# Altium PCB PCB.PcbDoc
Units mm, origin at the board's own origin, x right, y up, seen from the top; angles counter-clockwise.
Board outline 30.23 x 41.15 mm, 2 copper layers (Top Layer, Bottom Layer); 18 components, 21 nets, 57 pads, 4 vias.
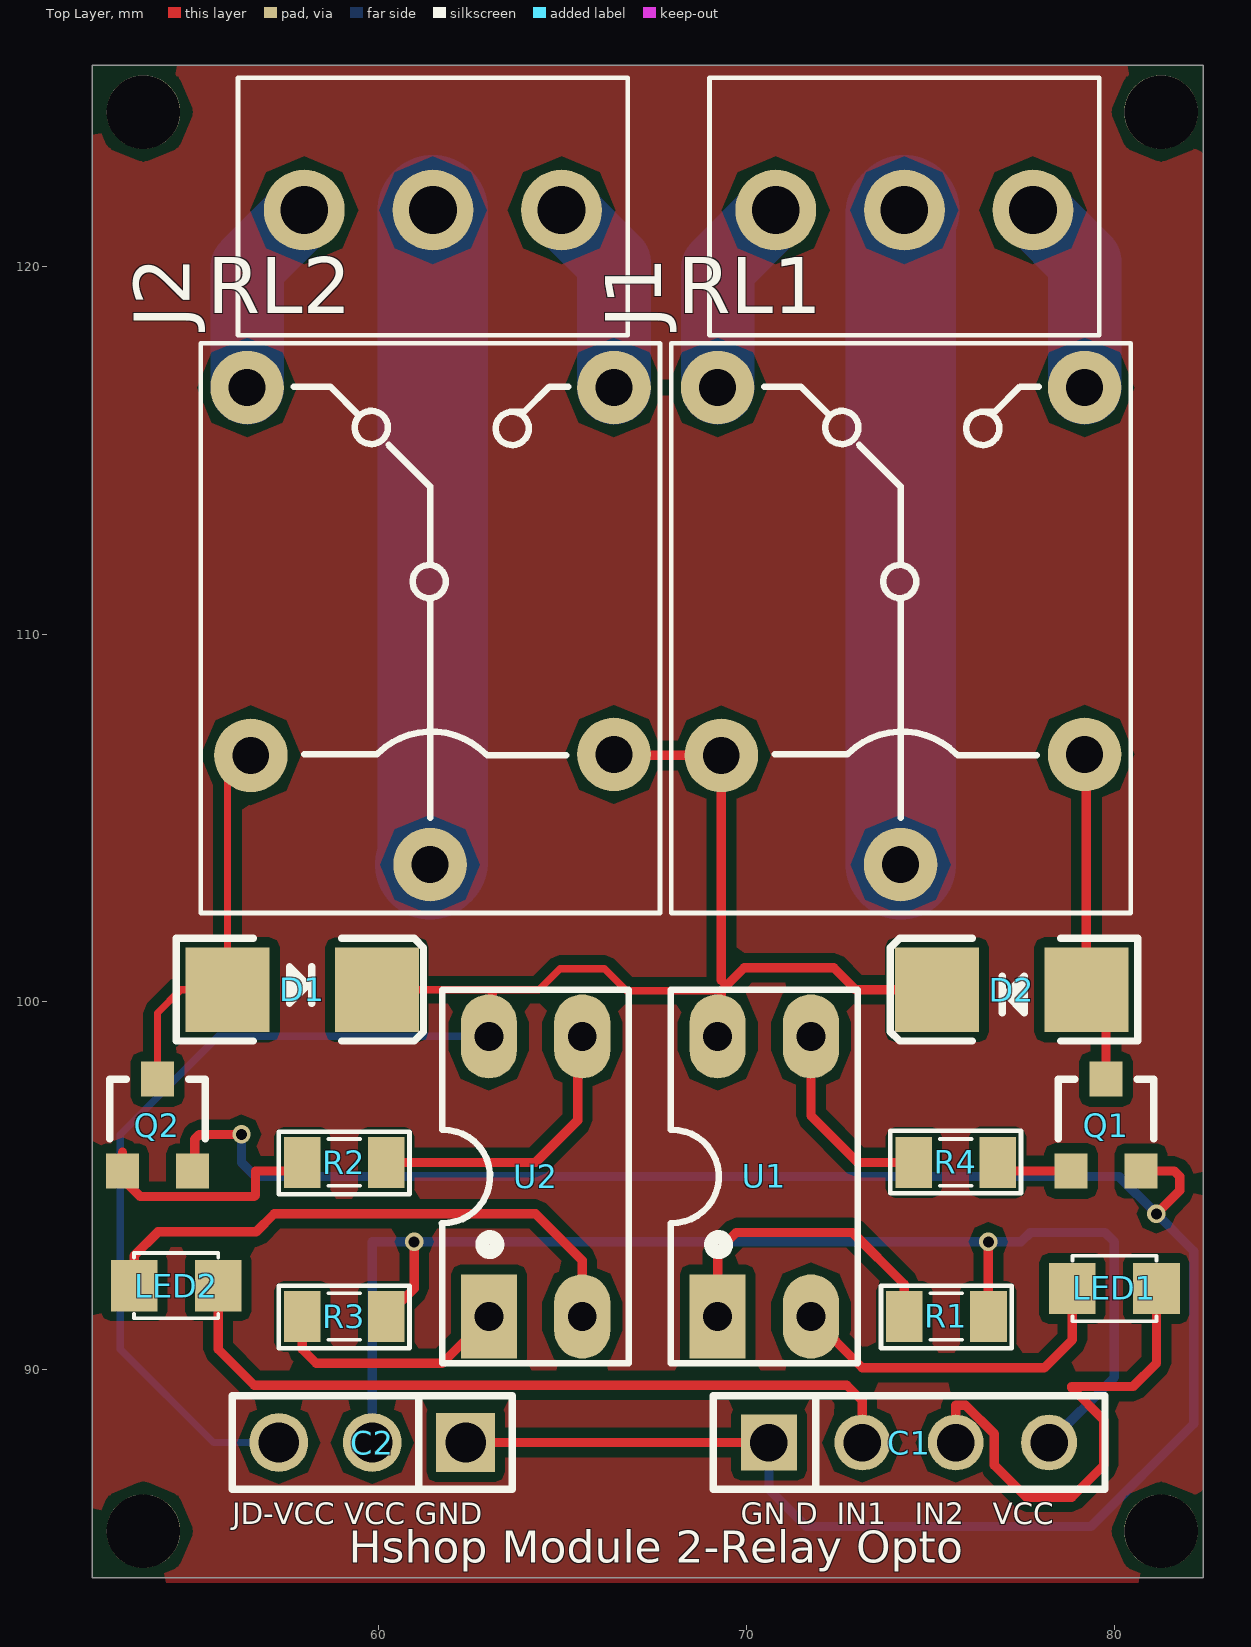
[diagram p0: Top Layer view]
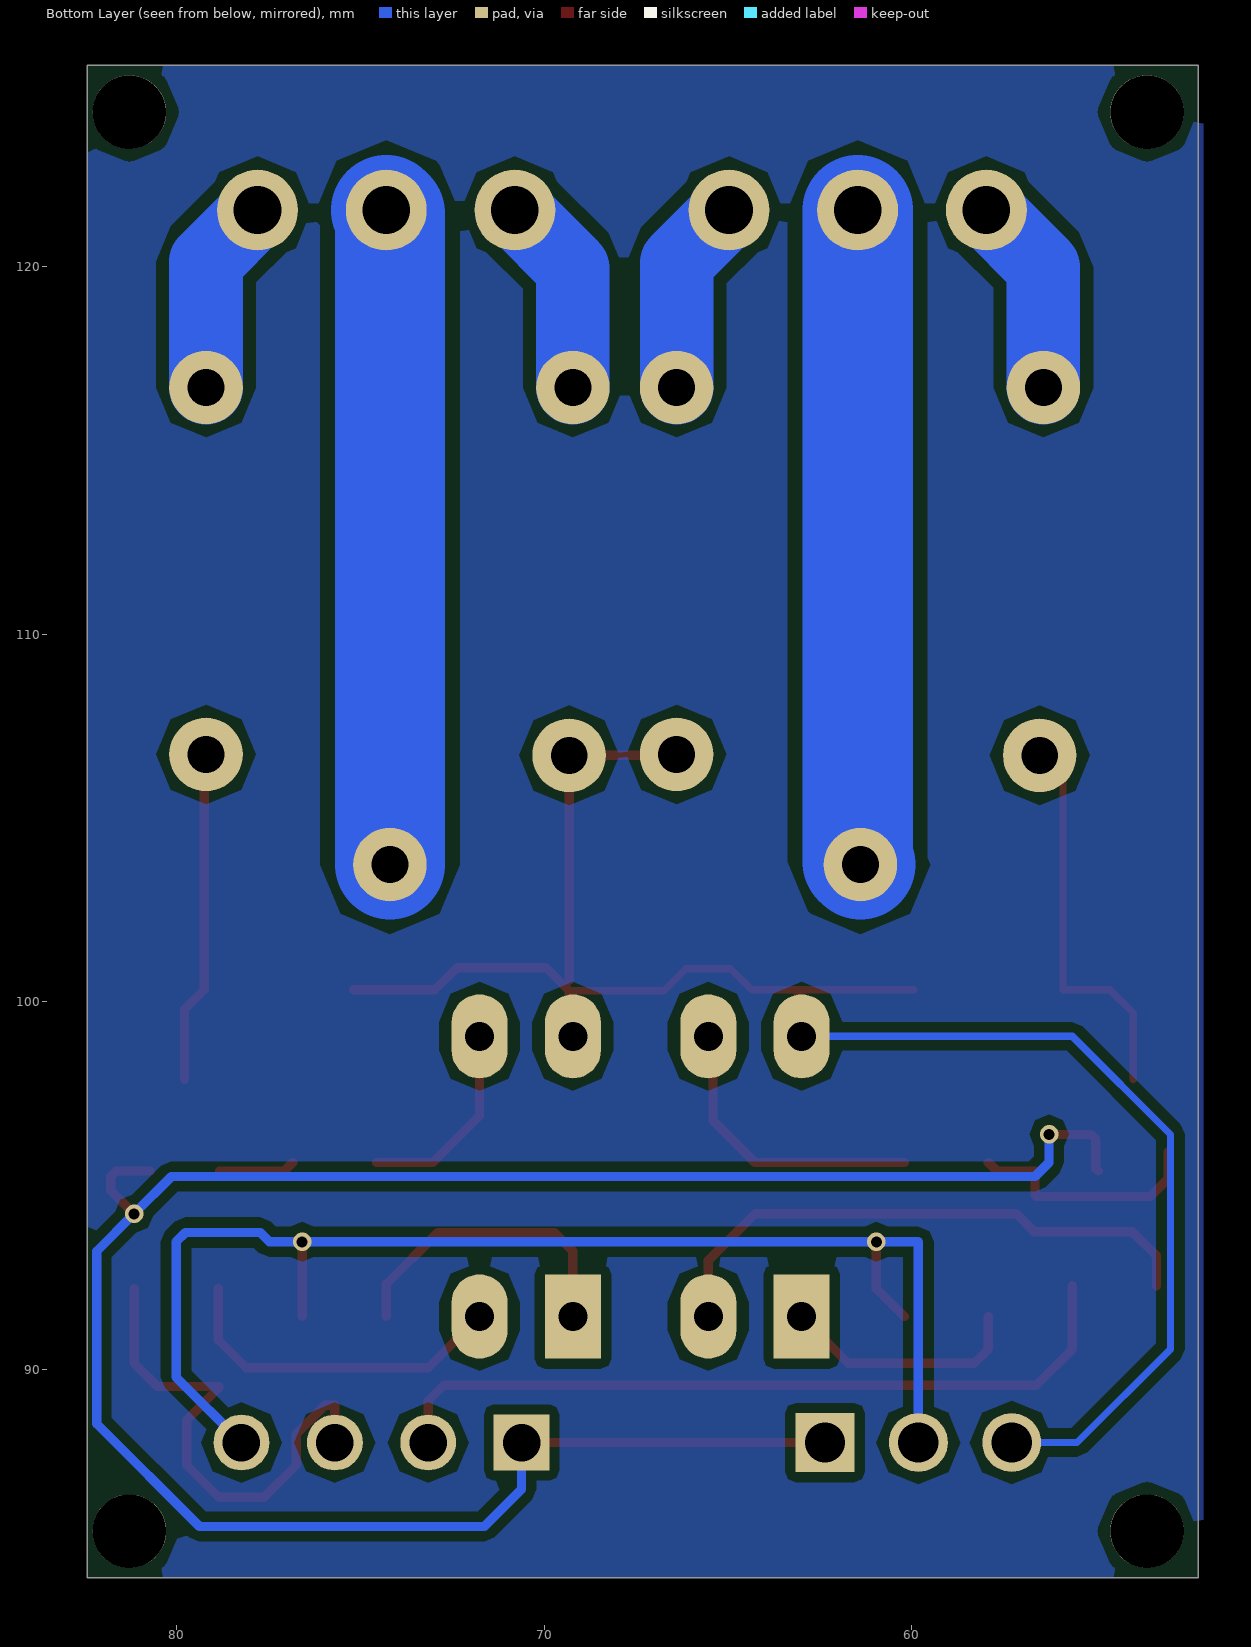
[diagram p1: Bottom Layer view, seen from below]
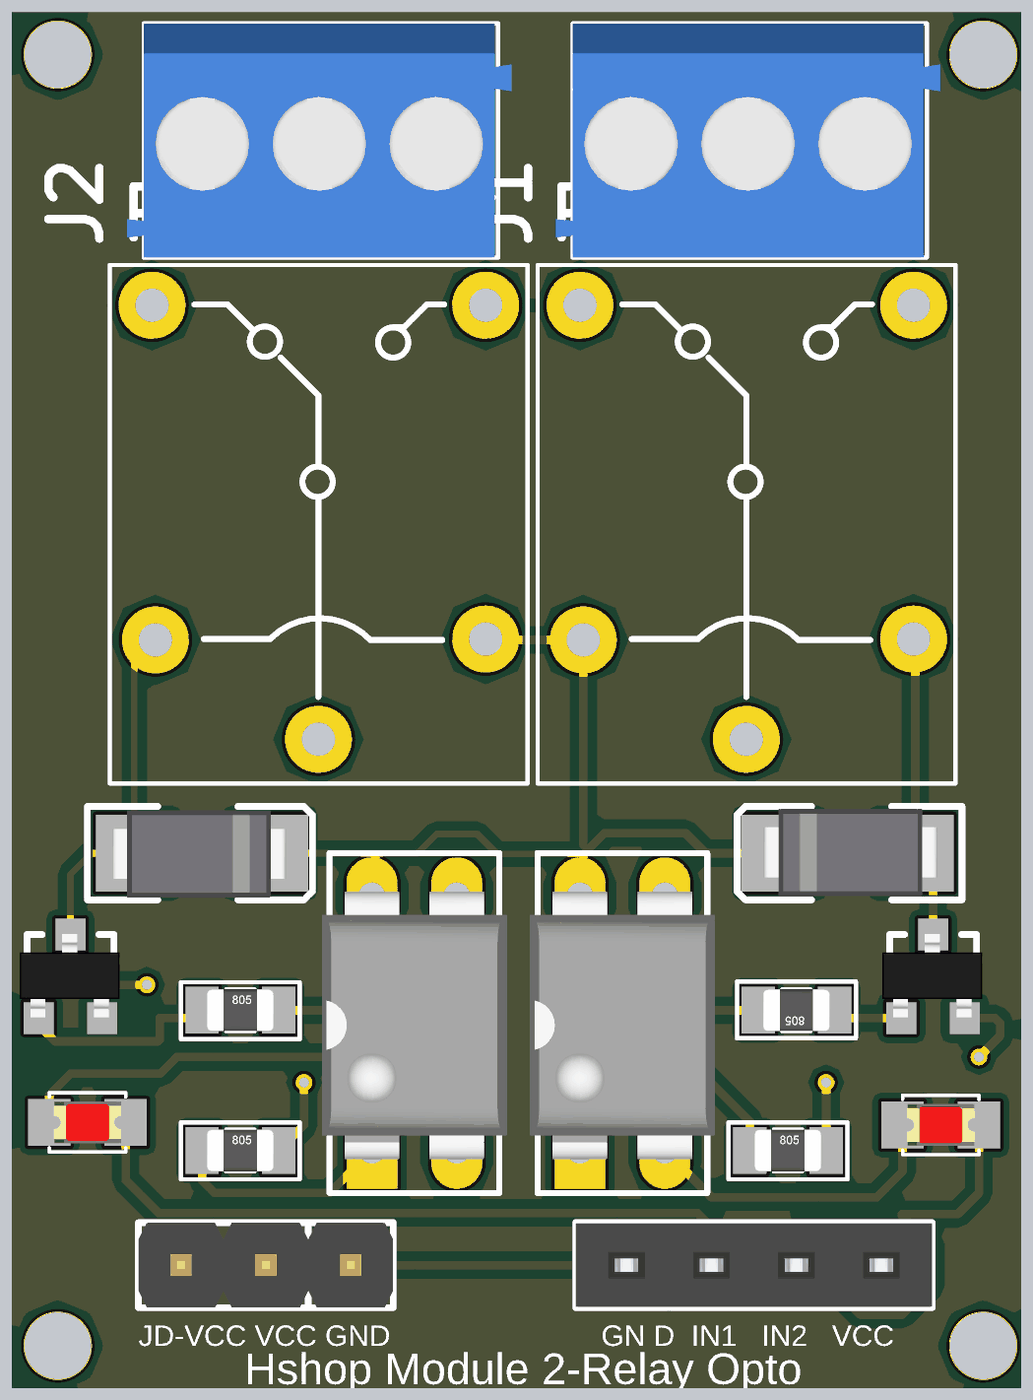
[diagram p2: 3D render of the assembled board from above, using the file's embedded part models]

## Layer stack, top to bottom
Top Solder: solder mask 0.0102, Solder Resist, Dk 3.5
Top Layer: signal copper 0.0356
Dielectric 1: dielectric 0.32, FR-4, Dk 4.8
Bottom Layer: signal copper 0.0356
Bottom Solder: solder mask 0.0102, Solder Resist, Dk 3.5

## Board outline
52.197,84.328 82.423,84.328 82.423,125.476 52.197,125.476

## Design rules (kind name [scope] priority, off if disabled: settings)
Clearance [All] p1: gap=0.254 ignorepadtopadclearanceinfootprint=FALSE
PolygonConnect [All] p1: connectstyle=Relief reliefconductorwidth=0.254 reliefentries=4 polygonreliefangle="90 Angle" airgapwidth=0.254
RoomDefinition Schematic [InComponentClass('Schematic')] p1: confinementstyle=ConfineIn formatcopy=TRUE lockcomponents=FALSE outline 0,0 50.8,0 50.8,25.4 0,25.4
RoutingVias [All] p1: holewidth=0.3 width=0.5 viastyle="Through Hole" minholewidth=0.3 minwidth=0.5 maxholewidth=0.3 maxwidth=0.5
SolderMaskExpansion [All] p1: expansion=0.102
Width [All] p1: maxlimit=3 minlimit=0.2 preferedwidth=0.4
30 further rules are at their usual default settings.

## Components (designator, comment, footprint, x,y, rotation, side; value= is the part's Value field where it differs from the comment)
C1 "JP4" JP4-C1T 70.612,88.011 r0 top
C2 "JP3" JP3-D1T 62.357,88.011 r180 top
D1 "Diode SMD" DIO-SMD-106 57.912,100.33 r180 top value=1N5007
D2 "Diode SMD" DIO-SMD-106 77.216,100.33 r0 top value=1N5007
J1 "KF3" KF3-3.5 74.295,121.539 r180 top
J2 "KF3" KF3-3.5 61.468,121.539 r180 top
LED1 "LED" LED-0805-Red 78.867,92.202 r0 top value="LED 3 - 5 ly 2 Colour"
LED2 "LED" LED-0805-Red 53.34,92.278 r0 top value="LED 3 - 5 ly 2 Colour"
Q1 "2N222" SOT23-231 79.781,96.647 r0 top value=C1815
Q2 "2N222" SOT23-231 53.975,96.647 r0 top value=C1815
R1 "1K" RES-SMD-0805 75.438,91.44 r0 top
R2 "0.51K" RES-SMD-0805 59.055,95.631 r0 top
R3 "1K" RES-SMD-0805 59.055,91.44 r0 top
R4 "0.51K" RES-SMD-0805 75.692,95.631 r180 top
RL1 "Relay 10A/12V" RL_T78 74.193,103.708 r90 top value="Relay SPDT, 10A, 12V"
RL2 "Relay 10A/12V" RL_T78 61.392,103.708 r90 top value="Relay SPDT, 10A, 12V"
U1 "PC817" DIP4 69.215,91.44 r0 top
U2 "PC817" DIP4 62.992,91.44 r0 top

## Footprints (in the part's own frame and the unit in brackets; to place one, negate y for a bottom-side part, rotate by r counter-clockwise, add the part's x,y. Pads: shape width x height; smd on the part's side, far side on the other; paste and mask are expansions set on the pad)
DIO-SMD-106 [mil]
  rect 90x90.55 smd: 1(80,0) 2(-80,0)
  silkscreen extent -130,-55 135,55, body extent -99,-50 106,52, height 95
DIP4 [mil]
  rect 60x90 hole 31: 1(0,0)
  oval 60x90 hole 31: 2(100,0) 3(100,300) 4(0,300)
  silkscreen extent -50,-50 150,350, body extent -59,-10 159,305, height 170
JP3-D1T [mm] "3 pins, 1 row, straight, gold plating"
  rect 1.6x1.6 hole 1.1: 1(0,0)
  round 1.6 hole 1.1: 2(2.54,0) 3(5.08,0)
  silkscreen extent -1.27,-1.27 6.35,1.27, body extent -1.27,-1.27 6.35,1.27, height 8.54
JP4-C1T [mm] "4 row, straight, gold plating"
  rect 1.52x1.52 hole 1.02: 1(0,0)
  round 1.52 hole 1.02: 2(2.54,0) 3(5.08,0) 4(7.62,0)
  silkscreen extent -1.52,-1.27 9.14,1.27, body extent -1.52,-1.25 9.14,1.25, height 8.51
KF3-3.5 [mm] "3,50mm - modular - blue - Horizontal wire entry - Pressure clamp - 8,4mm height - 03p"
  round 2.2 hole 1.3: 1(-3.5,0) 2(0,0) 3(3.5,0)
  silkscreen extent -5.3,-3.6 5.3,3.4, body extent -5.7,-3.6 5.8,3.4, height 8.41
LED-0805-Red [mil]
  rect 50x55 smd: 1(0,0) 2(90,0)
  silkscreen extent 0,-35 90,35, body extent 5,-25 85,25, height 43
RES-SMD-0805 [mil]
  rect 39.37x55 smd: 1(-45,0) 2(45,0)
  silkscreen extent -70,-34 70,33, body extent -39,-25 39,25, height 31
RL_T78 [mm]
  round 2 hole 1: 1(0.025,0) 2(13.005,4.978) 3(13.005,-5.004) 4(3.023,-5.004) 5(2.997,4.877)
  silkscreen extent -1.29,-6.26 14.21,6.24, body extent -1.3,-6.25 14.2,6.22, height 13.5
SOT23-231 [mm]
  rect 0.9x0.95 smd mask+0: 1(0.95,-1.25)
  rect 0.9x0.95 smd: 2(-0.95,-1.25) 3(0,1.25)
  silkscreen extent -1.3,-0.38 1.3,1.25, body extent -1.52,-1.23 1.48,1.27, height 1.06

## Part data
C1: "WR-PHD 2.54 mm Angled Socket Header", Manufacturer="Würth Elektronik eiSos GmbH", partNo=613004143121, ComponentLink1 Description=Manufacturer, ComponentLink1URL=http://www.we-online.com, ComponentLink2 Description=Datasheet, ComponentLink2URL=http://katalog.we-online.de/em/datasheet/6130xx143121.pdf, Created by="Karrer Zheng", Created Date="29 March 2013", NoPins=04
C2: "WR-PHD 2.54 mm Angled Socket Header", Manufacturer="Würth Elektronik eiSos GmbH", partNo=613003143121, ComponentLink1 Description=Manufacturer, ComponentLink1URL=http://www.we-online.com, ComponentLink2 Description=Datasheet, ComponentLink2URL=http://katalog.we-online.de/em/datasheet/6130xx143121.pdf, Created by="Karrer Zheng", Created Date="29 March 2013", NoPins=03
D1 D2: "Default Diode", Code - JEDEC=DO-214-AB, Published=8-Jun-2000, Publisher="Altium Limited", Revision="July-2002: Re-released for DXP Platform."
J1 J2: Manufacturer="Würth Elektronik eiSos GmbH", partNo=691103110003, ComponentLink1 Description=Manufacturer, ComponentLink1URL=http://www.we-online.com, ComponentLink2 Description=Datasheet, ComponentLink2URL=http://katalog.we-online.de/em/datasheet/6911031100xx.pdf, Created by="Karrer Zheng", Created Date="29 October 2013", NoPins=3
LED1 LED2: library part "LED SMD"
Q1 Q2: "NPN 600mW, ECB", =C2383
R1 R2 R3 R4: library part Res-SMD, "Resistor", Manufacturer="Generic Components", Class=Passive, Published=08/06/2000, Publisher="Altium Hobart Technology Centre"
RL1 RL2: library part "Relay 1", "Relay SPDT,10A - 12VDC 5 Pin", ="Relay SPDT, 10A, 24V"
U1 U2: "Single Opto"

## Free pads (board coordinates)
  round 2 hole 2: PAD1(81.28,124.206) PAD2(81.28,85.598) PAD3(53.594,85.598) PAD4(53.594,124.206)

## Via types
v1: diameter 0.5, hole 0.3, Top Layer to Bottom Layer, 4 vias

## Nets (pads, with @x,y where several pads share a name; then routed paths per layer and width w, separated by ;. In a path a pad name is that pad's centre, name@x,y a point inside that pad or via, vN(x,y) a via of type N, cw(c..) or ccw(c..) an arc to the next point about the centre after c; other vN are vias at no path point)
COM1: J1.2 RL1.1 | length 17.8
  Bottom Layer w3: RL1.1 74.193,121.437 J1.2
COM2: J2.2 RL2.1 | length 17.8
  Bottom Layer w3: RL2.1 61.468,103.81 J2.2
GND: C1.1 C2.1 Q1.1 Q2.1 | length 59.6
  Top Layer w0.254: Q2.1 54.991,95.463 54.991,96.266 55.118,96.393 v1(56.261,96.393) ; C2.1 C1.1 ; Q1.1 81.641,95.397 81.788,95.25 81.788,94.869 v1(81.153,94.234)
  Bottom Layer w0.254: v1(56.261,96.393) 56.261,95.631 56.642,95.25 80.137,95.25 v1(81.153,94.234) 82.169,93.218 82.169,88.519 79.375,85.725 71.628,85.725 70.612,86.741 C1.1
IN1: C1.2 LED2.2 | length 21
  Top Layer w0.254: LED2.2 55.626,90.551 56.607,89.57 72.731,89.57 73.152,89.149 C1.2
IN2: C1.3 LED1.2 | length 14
  Top Layer w0.254: C1.3 75.692,89.027 75.959,89.027 76.745,88.241 76.745,87.395 77.616,86.524 78.848,86.524 79.719,87.395 79.719,88.627 78.848,89.498 78.848,89.533 78.85,89.535 80.518,89.535 81.153,90.17 LED1.2
JD-VCC: C2.3 D1.2 D2.2 RL1.5 RL2.4 U1.4 U2.4 | length 50.3
  Top Layer w0.2: D1.2 62.992,100.33 ; U2.4 62.992,100.076 63.119,100.203 62.992,100.33 ; 69.317,100.305 66.736,100.305 66.138,100.903 64.926,100.903 64.353,100.33 62.992,100.33
  Top Layer w0.254: RL2.4 66.421,106.705 RL1.5 69.317,100.584 ; U1.4 69.317,99.162 69.317,100.305 69.942,100.93 72.372,100.93 72.972,100.33 D2.2
  Bottom Layer w0.2: C2.3 55.499,88.011 52.959,90.551 52.959,96.393 55.626,99.06 U2.4
NC1: J1.3 RL1.2 | length 5.5
  Bottom Layer w2: RL1.2 69.215,119.959 J1.3
NC2: J2.3 RL2.2 | length 5.5
  Bottom Layer w2: RL2.2 56.413,119.985 J2.3
NetD1_1: D1.1 Q2.3 RL2.5 | length 10.6
  Top Layer w0.2: Q2.3 53.975,99.695 54.61,100.33 D1.1 55.88,106.07 RL2.5
NetD2_1: D2.1 Q1.3 RL1.4 | length 9.1
  Top Layer w0.254: RL1.4 79.248,106.68 D2.1 79.781,99.797 Q1.3
NetLED1_1: LED1.1 U1.2 | length 9.4
  Top Layer w0.254: U1.2 73.152,90.043 78.105,90.043 78.867,90.805 LED1.1
NetLED2_1: LED2.1 U2.2 | length 15.5
  Top Layer w0.254: LED2.1 53.34,93.091 53.991,93.742 56.658,93.742 57.15,94.234 64.262,94.234 65.532,92.964 U2.2
NetQ1_2: Q1.2 R4.1 | length 2.2
  Top Layer w0.254: R4.1 77.069,95.397 Q1.2 Q1.2@78.74,95.306
NetQ2_2: Q2.2 R2.1 | length 6.6
  Top Layer w0.254: 53.025,95.905 Q2.2 53.025,95.184 53.506,94.703 56.603,94.703 56.642,94.742 56.642,95.399 57.68,95.399 R2.1
NetR1_1: R1.1 U1.1 | length 8.5
  Top Layer w0.254: U1.1 69.215,93.218 69.723,93.726 72.885,93.726 74.295,92.316 R1.1
NetR2_2: R2.2 U2.3 | length 8
  Top Layer w0.254: R2.2 64.262,95.631 65.405,96.774 65.405,98.933 U2.3
NetR3_1: R3.1 U2.1 | length 6.7
  Top Layer w0.254: R3.1 57.912,90.551 58.293,90.17 61.722,90.17 U2.1
NetR4_2: R4.2 U1.3 | length 5.5
  Top Layer w0.254: U1.3 71.755,96.901 73.025,95.631 R4.2
NO1: J1.1 RL1.3 | length 5.4
  Bottom Layer w2: J1.1 79.197,120.137 RL1.3
NO2: J2.1 RL2.3 | length 5.4
  Bottom Layer w2: J2.1 66.396,120.111 RL2.3
VCC: C1.4 C2.2 R1.2 R3.2 | length 36.4
  Top Layer w0.254: R3.2 60.96,92.202 v1(60.96,93.472) ; R1.2 v1(76.581,93.472)
  Bottom Layer w0.254: C2.2 59.817,93.472 v1(60.96,93.472) v1(76.581,93.472) 77.47,93.472 77.724,93.726 79.756,93.726 80.01,93.472 80.01,89.789 C1.4

## Polygon pours and split planes (outlines as drawn)
no net on Top Layer "Botton Layer-No Net 1" (solid, pour order 0): 82.423,125.476 52.197,125.476 52.197,84.201 82.296,84.201 82.423,84.328
no net on Bottom Layer "Botton Layer-No Net 1" (solid, pour order 2): 82.423,125.603 82.296,125.476 52.07,125.476 52.07,84.328 52.197,84.201 52.324,84.328 82.423,84.328

## Silkscreen, mask and mechanical layers (free items; w line width, h text height)
Top Overlay:
  text "JD-VCC VCC GND" at 56.007,85.598 h1
  text "GN D  IN1   IN2   VCC" at 69.85,85.598 h1
  text "Hshop Module 2-Relay Opto" at 59.182,84.455 h1.5